# Altium PCB mainboard_v1(1).PcbDoc
Units mm, origin at the board's own origin, x right, y up, seen from the top; angles counter-clockwise.
Board outline 28 x 41 mm, 4 copper layers (F.Cu, GND, PWR, B.Cu); 67 components, 54 nets, 272 pads, 135 vias.
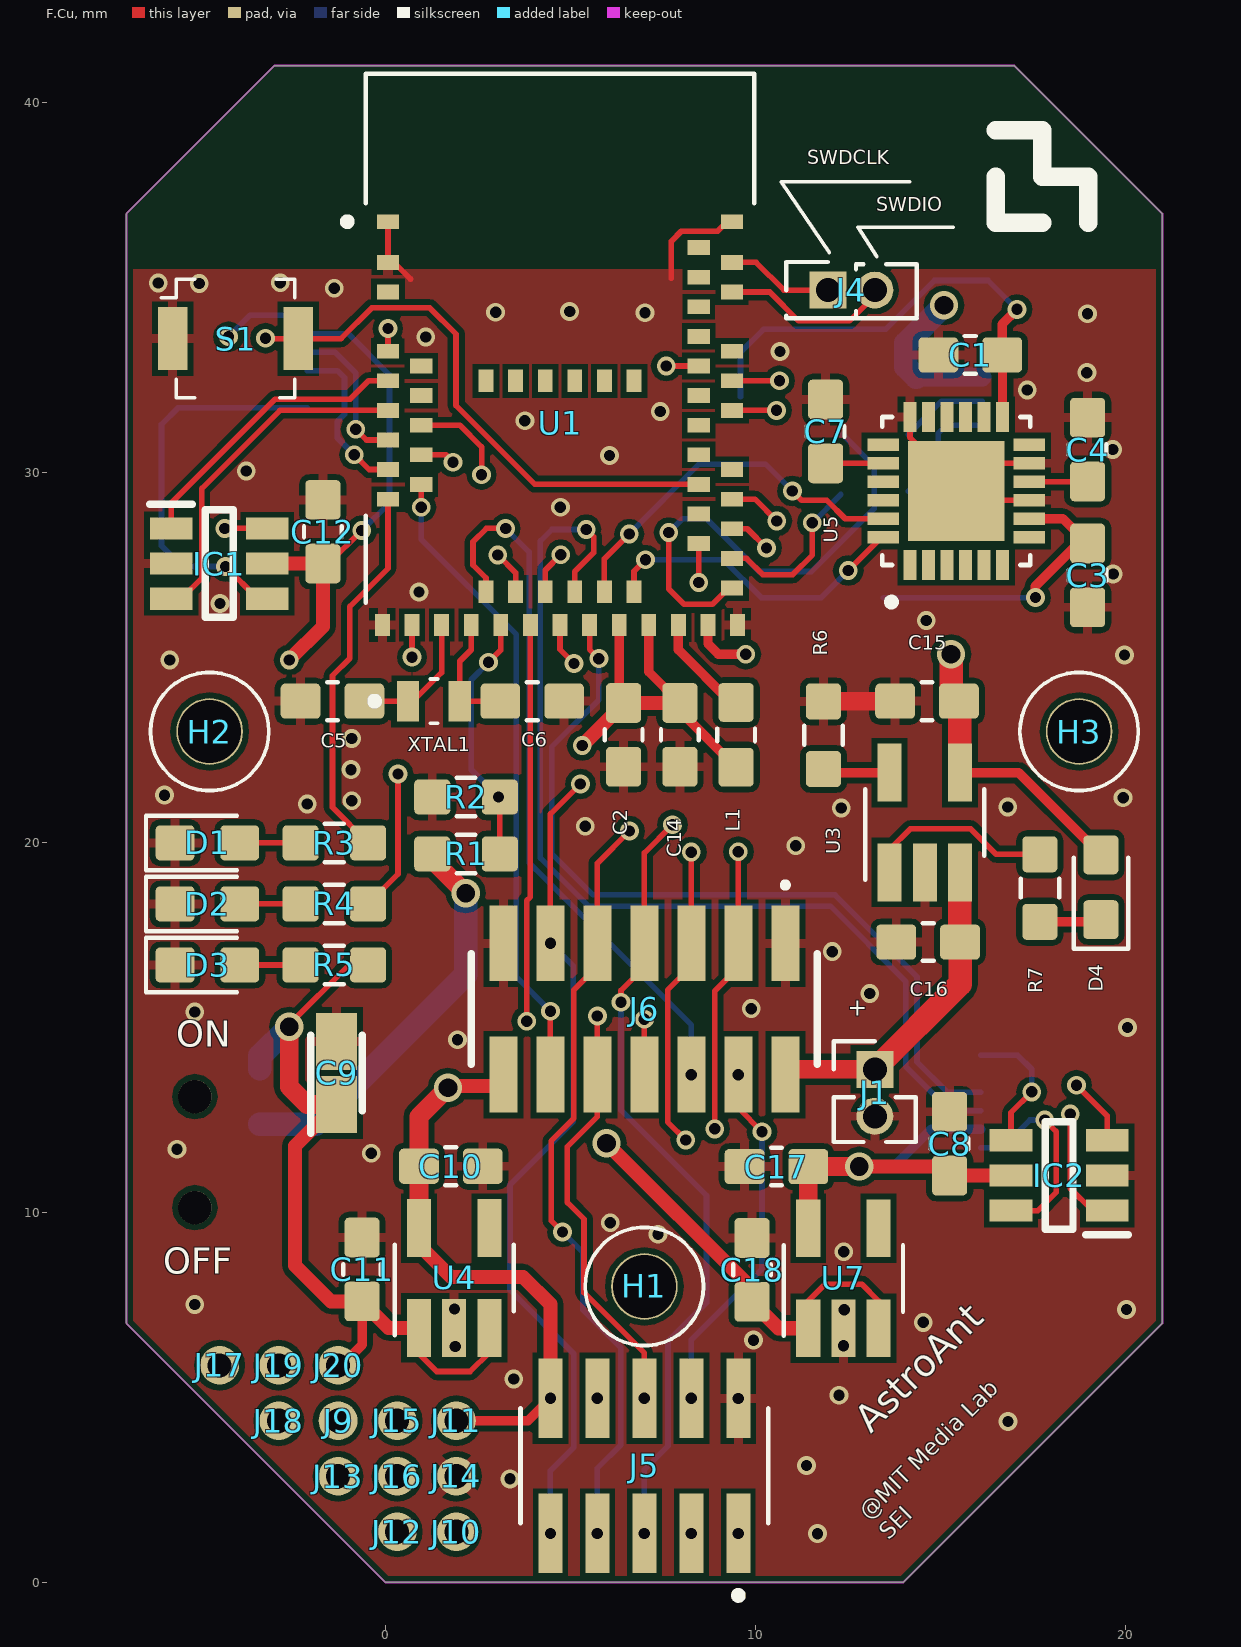
[diagram p0: F.Cu view]
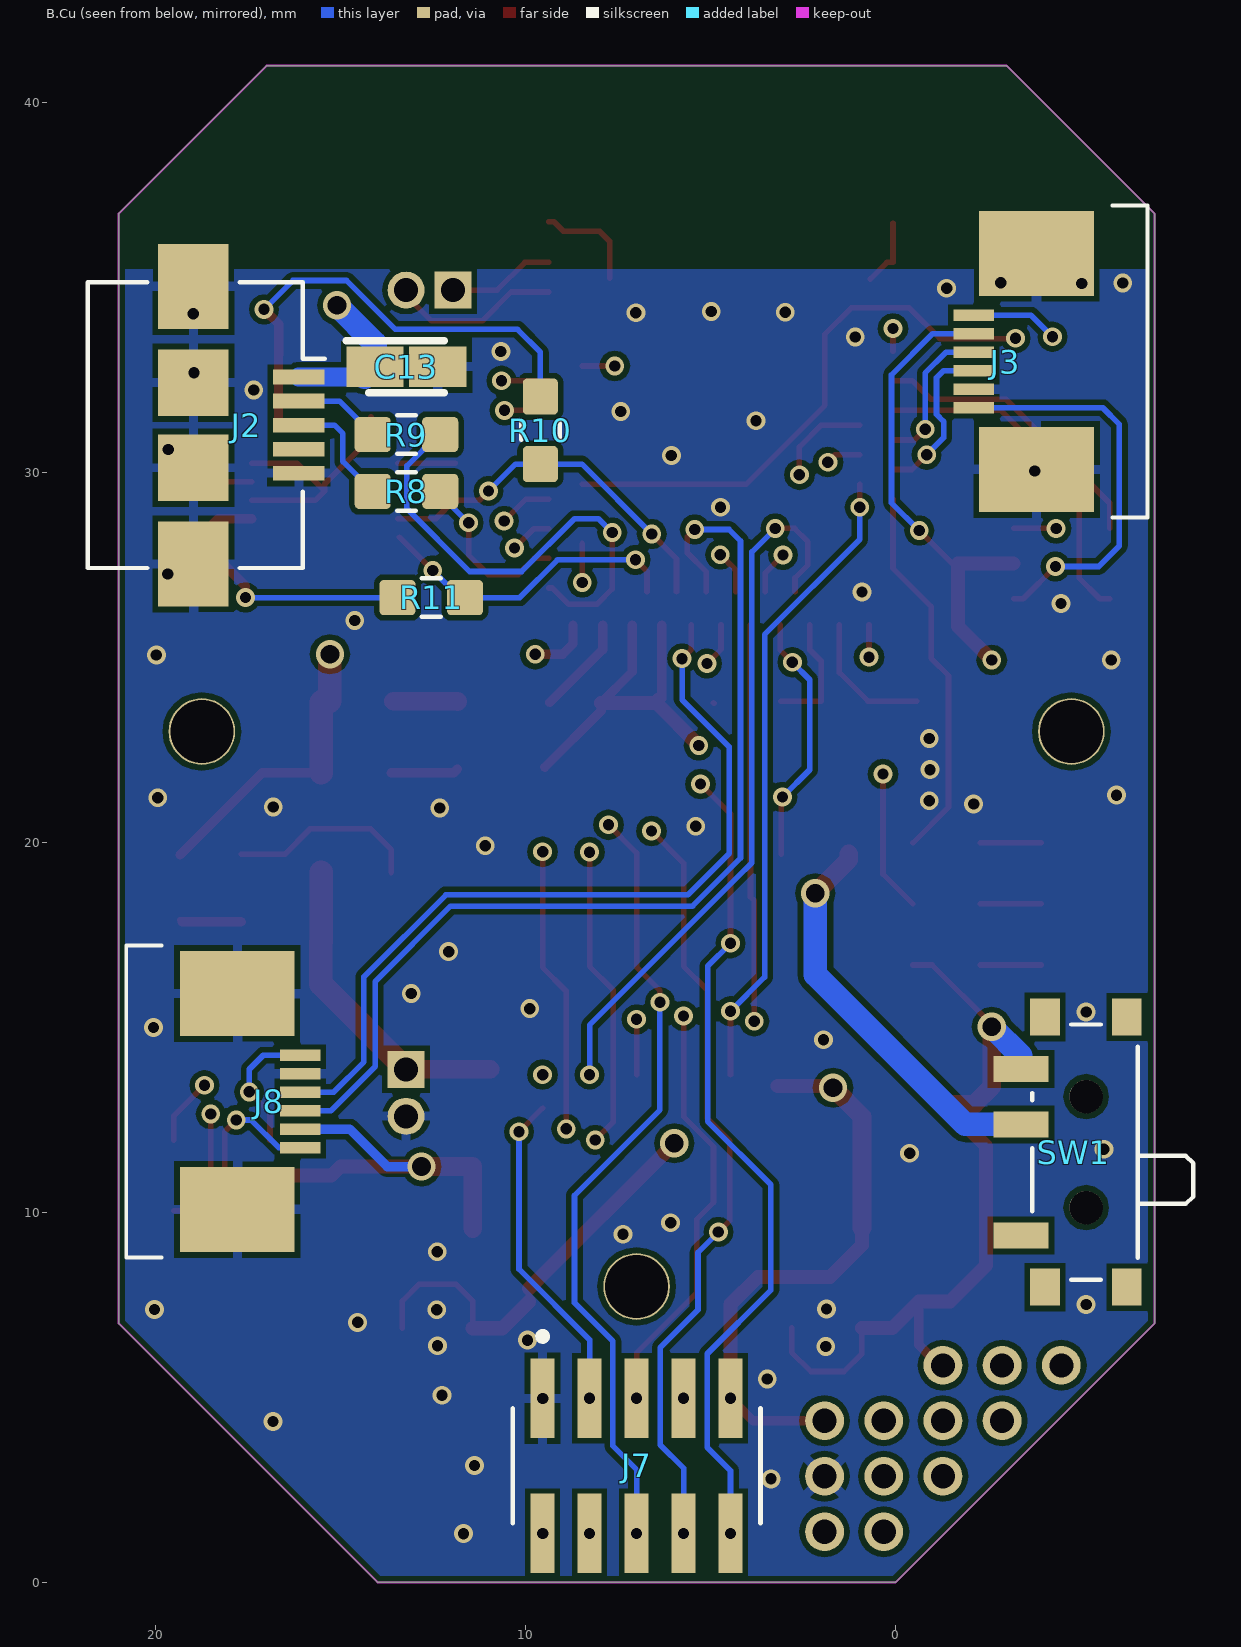
[diagram p1: B.Cu view, seen from below]
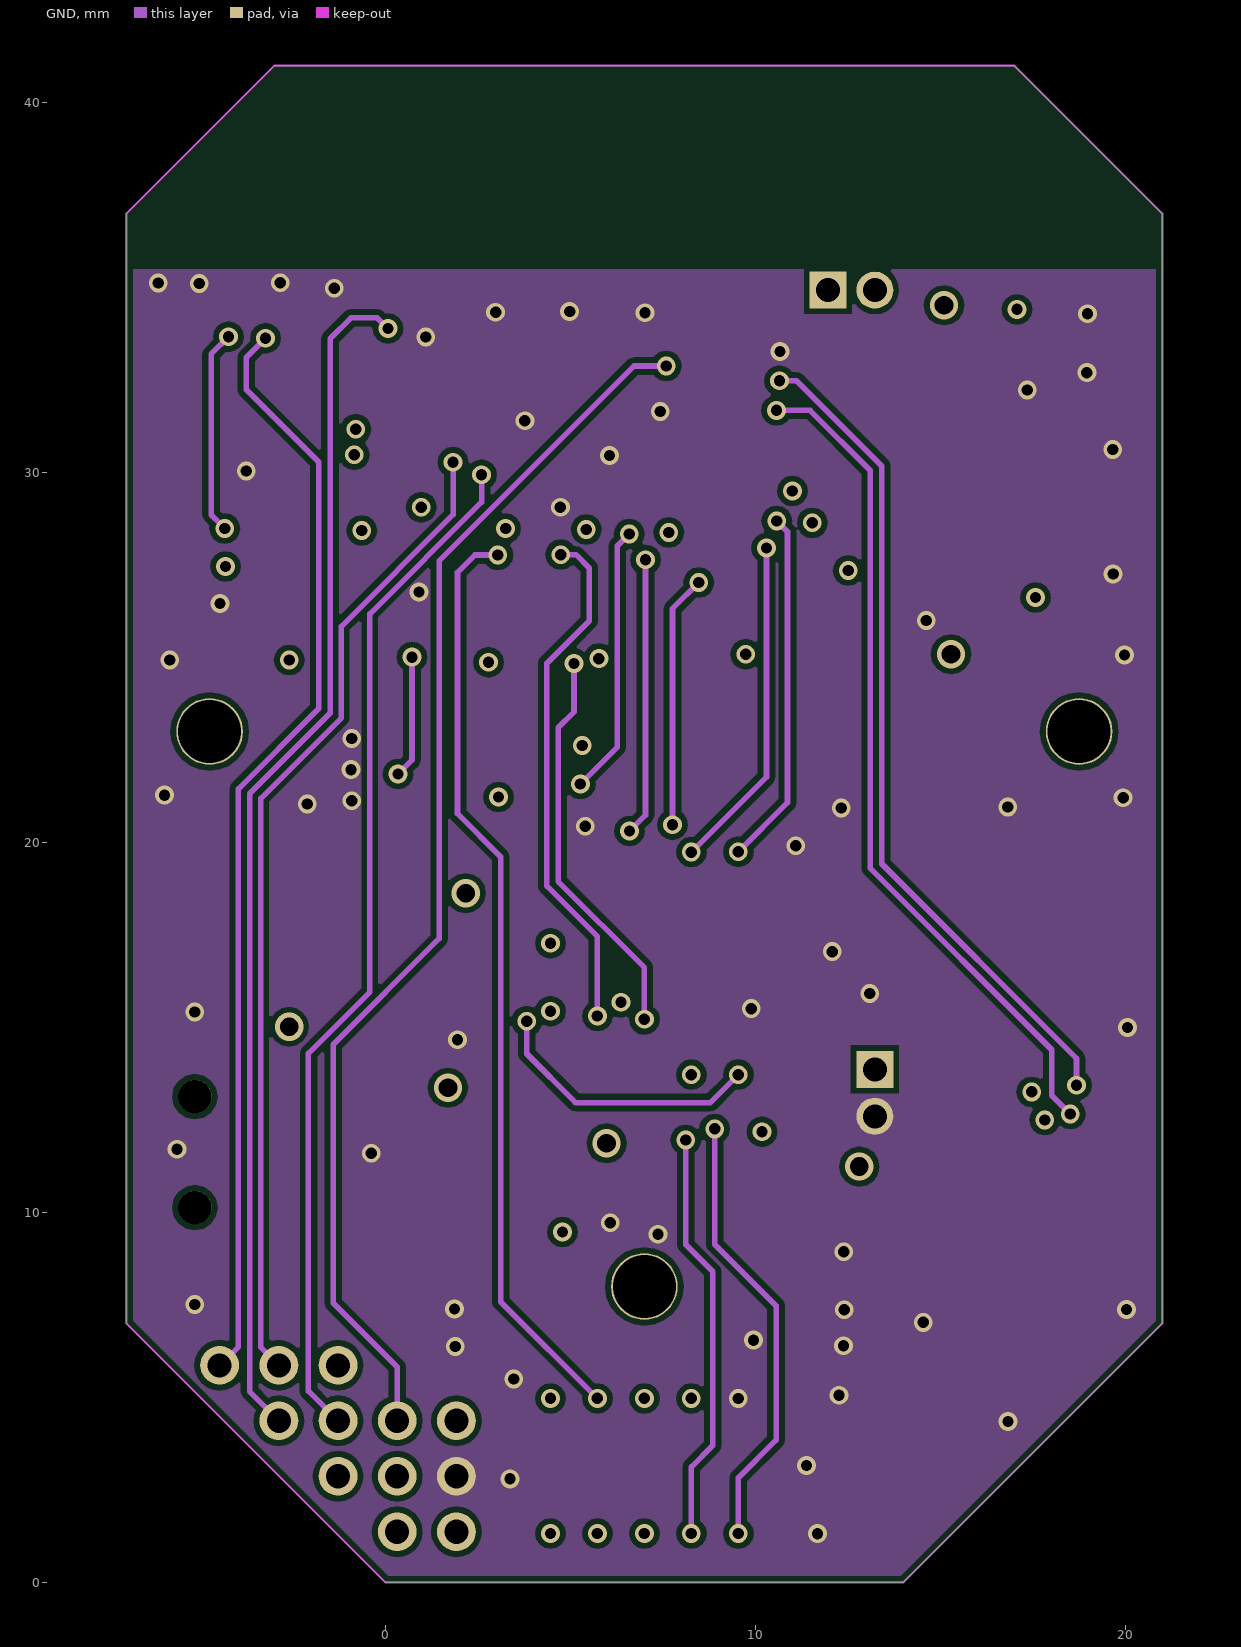
[diagram p2: GND]
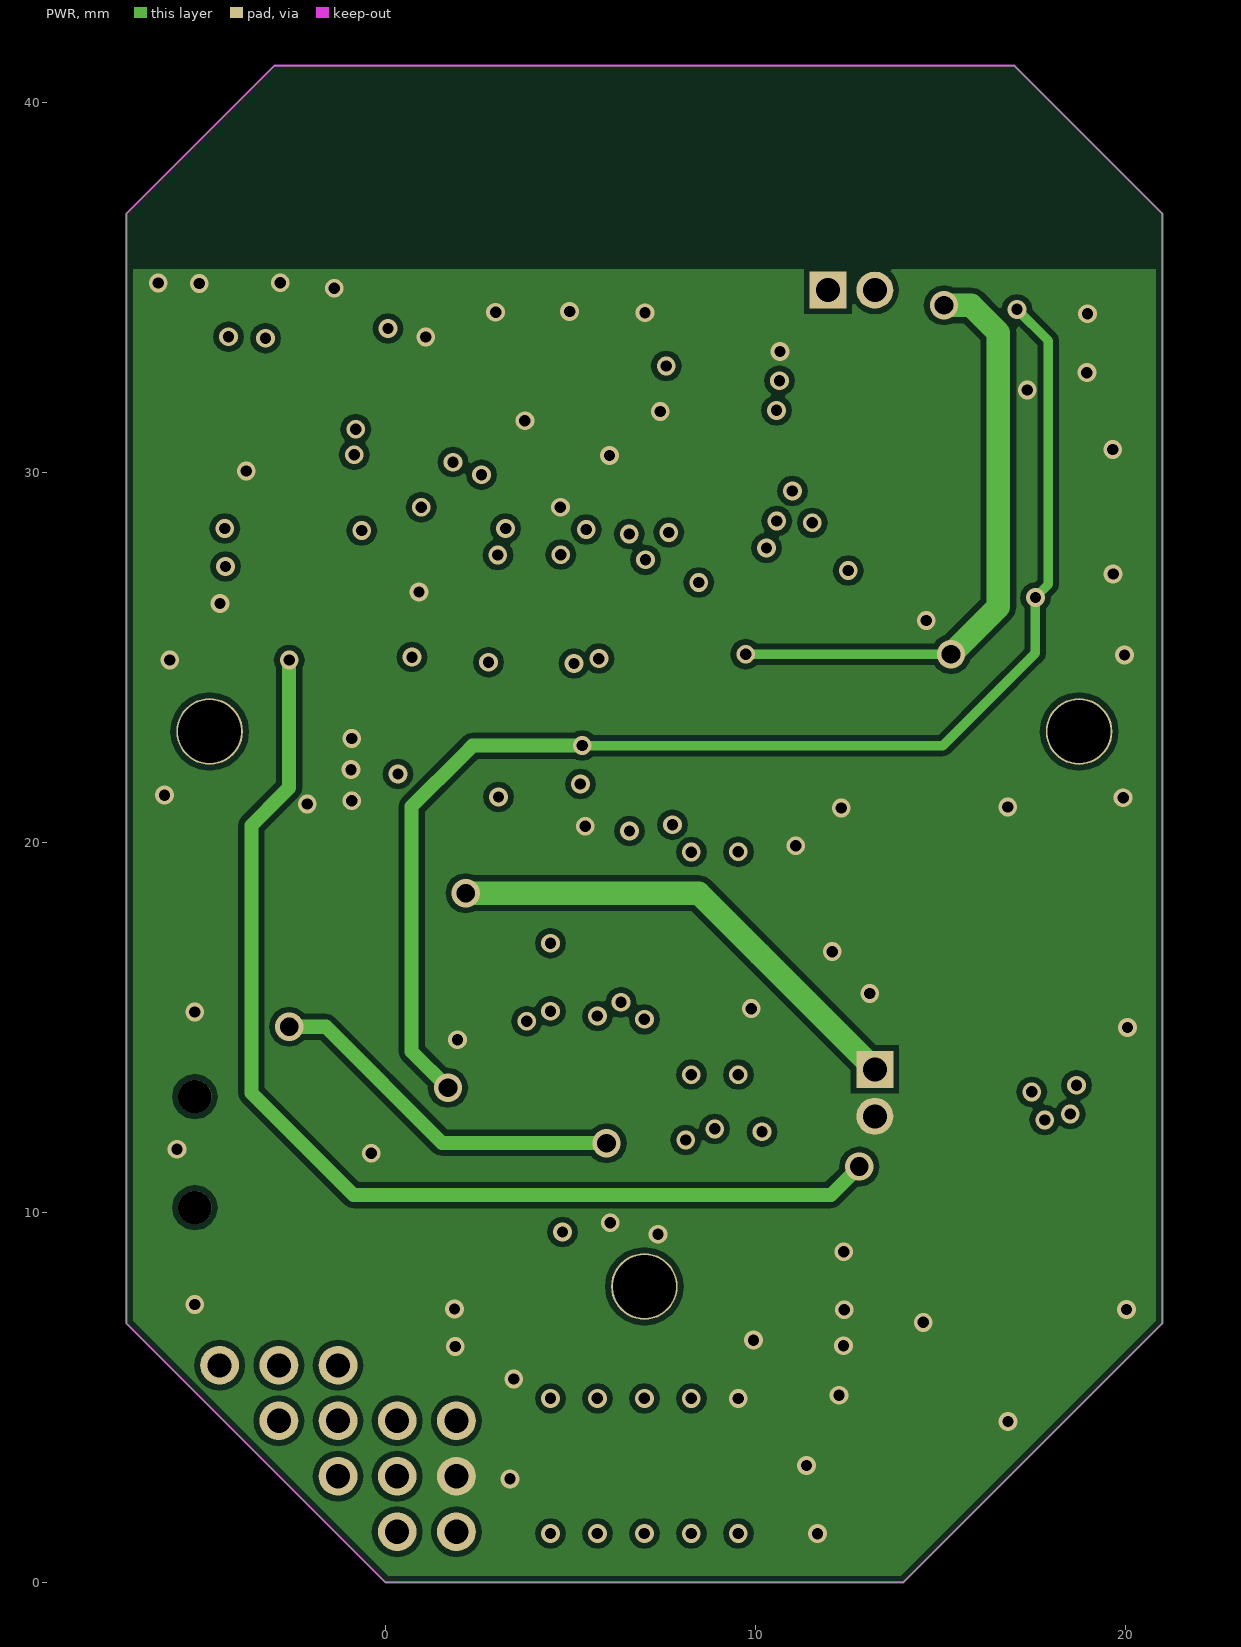
[diagram p3: PWR]

## Layer stack, top to bottom
F.Mask: solder mask 0.0102, Solder Resist, Dk 3.5
F.Cu: signal copper 0.0356
Dielectric 1: dielectric 0.32, FR-4, Dk 4.8
GND: signal copper 0.0356
Dielectric2: dielectric 0.32, FR-4, Dk 4.8
PWR: signal copper 0.0356
Dielectric3: dielectric 0.32, FR-4, Dk 4.8
B.Cu: signal copper 0.0356
B.Mask: solder mask 0.0102, Solder Resist, Dk 3.5

## Board outline
17,41 21,37 21,7 14,0 0,0 -7,7 -7,37 -3,41 17,41

## Design rules (kind name [scope] priority, off if disabled: settings)
Clearance "Clearence 0.1524_NetClass" [InNetClass('Default')] p1: gap=0.152 ignorepadtopadclearanceinfootprint=FALSE
Clearance "Clearence 0.1524_Polygon" [InNamedPolygon('F.Cu-GND') OR InNamedPolygon('GND-GND') OR InNamedPolygon('B.Cu-GND') OR InNamedPolygon('PWR-GND')] p2: gap=0.152 ignorepadtopadclearanceinfootprint=FALSE
HoleSize "Hole Size (Default)" [All] p1: absolutevalues=TRUE maxlimit=10 minlimit=0.305 maxpercent=80.000 minpercent=20.000
MinimumSolderMaskSliver [All] p1: minsoldermaskwidth=0
PolygonConnect Polygon_PWR-GND_ConnectDirect [IsNamedPolygon('PWR-GND')] p1: connectstyle=Direct reliefconductorwidth=0.254 reliefentries=4 polygonreliefangle="90 Angle" airgapwidth=0.254
PolygonConnect Polygon_B.Cu-GND_ConnectDirect [IsNamedPolygon('B.Cu-GND') vs IsVia] p2: connectstyle=Direct reliefconductorwidth=0.254 reliefentries=4 polygonreliefangle="90 Angle" airgapwidth=0.254
PolygonConnect Polygon_B.Cu-GND_ConnectRelief45 [IsNamedPolygon('B.Cu-GND') vs (IsThruPin or IsSMTPin) and (PadShape_AllLayers = 'Round')] p3: connectstyle=Relief reliefconductorwidth=0.254 reliefentries=4 polygonreliefangle="45 Angle" airgapwidth=0.152
PolygonConnect Polygon_B.Cu-GND_ConnectRelief90 [IsNamedPolygon('B.Cu-GND') vs (IsThruPin or IsSMTPin) and (PadShape_AllLayers <> 'Round')] p4: connectstyle=Relief reliefconductorwidth=0.254 reliefentries=4 polygonreliefangle="90 Angle" airgapwidth=0.152
PolygonConnect Polygon_GND-GND_ConnectDirect [IsNamedPolygon('GND-GND')] p5: connectstyle=Direct reliefconductorwidth=0.254 reliefentries=4 polygonreliefangle="90 Angle" airgapwidth=0.254
PolygonConnect Polygon_F.Cu-GND_ConnectDirect [IsNamedPolygon('F.Cu-GND') vs IsVia] p6: connectstyle=Direct reliefconductorwidth=0.254 reliefentries=4 polygonreliefangle="90 Angle" airgapwidth=0.254
PolygonConnect Polygon_F.Cu-GND_ConnectRelief45 [IsNamedPolygon('F.Cu-GND') vs (IsThruPin or IsSMTPin) and (PadShape_AllLayers = 'Round')] p7: connectstyle=Relief reliefconductorwidth=0.254 reliefentries=4 polygonreliefangle="45 Angle" airgapwidth=0.152
PolygonConnect Polygon_F.Cu-GND_ConnectRelief90 [IsNamedPolygon('F.Cu-GND') vs (IsThruPin or IsSMTPin) and (PadShape_AllLayers <> 'Round')] p8: connectstyle=Relief reliefconductorwidth=0.254 reliefentries=4 polygonreliefangle="90 Angle" airgapwidth=0.152
RoutingVias [All] p1: holewidth=0.711 width=1.27 viastyle="Through Hole" minholewidth=0.711 minwidth=1.27 maxholewidth=0.711 maxwidth=1.27
SilkToSilkClearance [All] p1: silktosilkclearance=0
SilkToSolderMaskClearance [IsPad] p1: minsilkscreentomaskgap=0 clearancetoexposedcopper=TRUE
SolderMaskExpansion [All] p1: expansion=0.102 istentingtop=FALSE
Width [All] p1: maxlimit=10 minlimit=0.152 preferedwidth=0.152 minimp=50.000000 maximp=50.000000 favimp=50.000000
26 further rules are at their usual default settings.

## Classes and differential pairs
net class Default: +3V3 A0 A1 A3 A5 D5 D6 D9 D11 D12 D13 GND GP0 GP2 LED1 LED2 M1_IN1 M1_IN2 M1_O1 M1_O2 M2_IN1 M2_IN2 M2_O1 M2_O2 MISO MOSI MOTOR1_A MOTOR1_B Net-(C4-Pad2) Net-(C5-Pad1) Net-(C6-Pad1) Net-(C7-Pad2) Net-(C11-Pad2) Net-(D1-Pad2) Net-(D2-Pad2) Net-(D3-Pad2) Net-(D4-Pad1) Net-(L1-Pad2) Net-(R6-Pad1) Net-(R7-Pad2) Net-(R8-Pad2) Net-(R9-Pad2) R\E\S\E\T\ SCK SCL SDA SWDCLK SWDIO SWO USB+ USB- VBUS VCC VPP

## Components (designator, comment, footprint, x,y, rotation, side; value= is the part's Value field where it differs from the comment)
C1 "0.1uF" C_0603_1608Metric_Pad1.08x0.95mm_HandSolder 15.81,33.18 r0 top
C2 "10uF" C_0603_1608Metric_Pad1.08x0.95mm_HandSolder 6.44,22.91 r90 top
C3 "10000pF" C_0603_1608Metric_Pad1.08x0.95mm_HandSolder 18.98,27.22 r90 top
C4 "0.1uF" C_0603_1608Metric_Pad1.08x0.95mm_HandSolder 18.98,30.62 r270 top
C5 "22PF" C_0603_1608Metric_Pad1.08x0.95mm_HandSolder -1.43,23.82 r180 top
C6 "22PF" C_0603_1608Metric_Pad1.08x0.95mm_HandSolder 3.97,23.82 r0 top
C7 "2200pF" C_0603_1608Metric_Pad1.08x0.95mm_HandSolder 11.9,31.11 r270 top
C8 "0.1uF" C_0603_1608Metric_Pad1.08x0.95mm_HandSolder 15.25,11.86 r270 top
C9 "TAJP106K010RNJ" CAPPM2014X170N#1 -1.32,13.77 r90 top
C10 "10uF" C_0603_1608Metric_Pad1.08x0.95mm_HandSolder 1.77,11.25 r180 top
C11 "0.1uF" C_0603_1608Metric_Pad1.08x0.95mm_HandSolder -0.63,8.46 r270 top
C12 "0.1uF" C_0603_1608Metric_Pad1.08x0.95mm_HandSolder -1.69,28.4 r270 top
C13 "TAJP106K010RNJ" CAPPM2014X170N#2 13.22,32.86 r0 bottom
C14 "10uF" C_0603_1608Metric_Pad1.08x0.95mm_HandSolder 7.96,22.91 r90 top
C15 "10uF" C_0603_1608Metric_Pad1.08x0.95mm_HandSolder 14.64,23.82 r0 top
C16 "10uF" C_0603_1608Metric_Pad1.08x0.95mm_HandSolder 14.67,17.31 r0 top
C17 "10uF" C_0603_1608Metric_Pad1.08x0.95mm_HandSolder 10.57,11.24 r0 top
C18 "0.1uF" C_0603_1608Metric_Pad1.08x0.95mm_HandSolder 9.91,8.45 r270 top
D1 "LED" LED_0603_1608Metric_Pad1.05x0.95mm_HandSolder -4.81,19.99 r0 top
D2 "LED" LED_0603_1608Metric_Pad1.05x0.95mm_HandSolder -4.81,18.34 r0 top
D3 "LED" LED_0603_1608Metric_Pad1.05x0.95mm_HandSolder -4.81,16.69 r0 top
D4 "LED" LED_0603_1608Metric_Pad1.05x0.95mm_HandSolder 19.34,18.79 r90 top
H1 "M2" mounthole_1.8mm 7,8 r0 top
H2 "M2" mounthole_1.8mm -4.75,23 r0 top
H3 "M2" mounthole_1.8mm 18.75,23 r0 top
IC1 "MP6513GJ-Z" SOT95P280X100-6N -4.49,27.54 r0 top
IC2 "MP6513GJ-Z" SOT95P280X100-6N 18.21,11 r180 top
J1 "22-23-2021" PinHeader_1x02_P1.27mm_Vertical 13.23,13.87 r0 top
J2 "USB_B_Micro" USB_Micro-B_Amphenol_10104110_Horizontal 17.68,31.28 r90 bottom
J3 "1734592-6" 17345926 -4.61,33 r270 bottom
J4 "22-23-2021" PinHeader_2x01_P1.27mm_Vertical 11.96,34.93 r0 top
J5 "20021321-00010C4LF" HARWIN_M50-3100545#1 7,3.15 r0 top
J6 "20021321-00014C1LF" 2002132100014C1LF 7,15.5 r0 top
J7 "20021321-00010C4LF" HARWIN_M50-3100545#2 7,3.15 r180 bottom
J8 "1734592-6" 17345926 18.59,13 r90 bottom
J9 "1_pin_sig" 1.27mm_pin_hole#1 -2.04,4.37 r0 top
J10 "1_pin_sig" 1.27mm_pin_hole#2 1.92,1.37 r0 top
J11 "1_pin_sig" 1.27mm_pin_hole#3 2.56,4.37 r0 top
J12 "1_pin_sig" 1.27mm_pin_hole#2 0.32,1.37 r0 top
J13 "1_pin_sig" 1.27mm_pin_hole#4 3.36,2.87 r0 top
J14 "1_pin_sig" 1.27mm_pin_hole#5 6.61,2.87 r0 top
J15 "1_pin_sig" 1.27mm_pin_hole#2 0.32,4.37 r0 top
J16 "1_pin_sig" 1.27mm_pin_hole#6 5,2.87 r0 top
J17 "1_pin_sig" 1.27mm_pin_hole#2 -4.48,5.87 r0 top
J18 "1_pin_sig" 1.27mm_pin_hole#2 -2.88,4.37 r0 top
J19 "1_pin_sig" 1.27mm_pin_hole#2 -2.88,5.87 r0 top
J20 "1_pin_sig" 1.27mm_pin_hole#2 -1.28,5.87 r0 top
L1 "10uH" L_0603_1608Metric_Pad1.05x0.95mm_HandSolder 9.48,22.91 r90 top
R1 "100k" R_0603_1608Metric_Pad0.98x0.95mm_HandSolder#1 2.18,19.69 r180 top
R2 "100k" R_0603_1608Metric_Pad0.98x0.95mm_HandSolder#1 2.18,21.23 r0 top
R3 "1k" R_0603_1608Metric_Pad0.98x0.95mm_HandSolder#1 -1.38,19.99 r0 top
R4 "1k" R_0603_1608Metric_Pad0.98x0.95mm_HandSolder#1 -1.38,18.34 r0 top
R5 "1k" R_0603_1608Metric_Pad0.98x0.95mm_HandSolder#1 -1.38,16.69 r180 top
R6 "4.99k" R_0603_1608Metric_Pad0.98x0.95mm_HandSolder#1 11.84,22.9 r90 top
R7 "1k" R_0603_1608Metric_Pad0.98x0.95mm_HandSolder#1 17.69,18.767 r90 top
R8 "27" R_0603_1608Metric_Pad0.98x0.95mm_HandSolder#2 13.22,29.49 r0 bottom
R9 "27" R_0603_1608Metric_Pad0.98x0.95mm_HandSolder#2 13.22,31.027 r0 bottom
R10 "10k" R_0603_1608Metric_Pad0.98x0.95mm_HandSolder#2 9.6,31.14 r270 bottom
R11 "10k" R_0603_1608Metric_Pad0.98x0.95mm_HandSolder#2 12.55,26.62 r180 bottom
S1 "B3U-1000P" Switch_Tactile_SMD_B3U-1000P -4.05,33.62 r0 top
SW1 "SW_SPDT" SW_SPDT_PCM12 -4.82,11.63 r270 bottom
U1 "MDBT50Q-1MV2" XCVR_MDBT50Q-1MV2 4.72,33.03 r0 top
U3 "MCP73831T-2ACI_OT" SOT-23-5_HandSoldering 14.58,20.54 r90 top
U4 "AP2112K-3.3" SOT-23-5_HandSoldering 1.86,8.23 r90 top
U5 "MPU6050" IC_MPU6050 15.43,29.5 r90 top
U7 "AP2112K-3.3" SOT-23-5_HandSoldering 12.38,8.22 r90 top
XTAL1 "32.768KHz" ECS32712512TR 1.31,23.82 r0 top

## Footprints (in the part's own frame and the unit in brackets; to place one, negate y for a bottom-side part, rotate by r counter-clockwise, add the part's x,y. Pads: shape width x height; smd on the part's side, far side on the other; paste and mask are expansions set on the pad)
1.27mm_pin_hole#1 [mm]
  round 1.05 hole 0.65 paste-1.05 mask+0: 1(0.76,0)
1.27mm_pin_hole#2 [mm]
  round 1.05 hole 0.65 paste-1.05 mask+0: 1(0,0)
1.27mm_pin_hole#3 [mm]
  round 1.05 hole 0.65 paste-1.05 mask+0: 1(-0.64,0)
1.27mm_pin_hole#4 [mm]
  round 1.05 hole 0.65 paste-1.05 mask+0: 1(-4.64,0)
1.27mm_pin_hole#5 [mm]
  round 1.05 hole 0.65 paste-1.05 mask+0: 1(-4.69,0)
1.27mm_pin_hole#6 [mm]
  round 1.05 hole 0.65 paste-1.05 mask+0: 1(-4.68,0)
17345926 [mm]
  rect 0.3x1.1 smd mask+0: 1(1.25,-2.5) 2(0.75,-2.5) 3(0.25,-2.5) 4(-0.25,-2.5) 5(-0.75,-2.5) 6(-1.25,-2.5)
  rect 2.3x3.1 smd mask+0: MP1(2.92,-0.8) MP2(-2.92,-0.8)
  silkscreen extent -4.22,1.25 4.22,2.2
2002132100014C1LF [mm]
  rect 0.76x2.05 smd mask+0: 1(3.81,1.775) 2(3.81,-1.775) 3(2.54,1.775) 4(2.54,-1.775) 5(1.27,1.775) 6(1.27,-1.775) 7(0,1.775) 8(0,-1.775) 9(-1.27,1.775) 10(-1.27,-1.775) 11(-2.54,1.775) 12(-2.54,-1.775) 13(-3.81,1.775) 14(-3.81,-1.775)
  silkscreen extent -4.67,-1.5 4.67,3.4
C_0603_1608Metric_Pad1.08x0.95mm_HandSolder [mm]
  rrect25% 1.075x0.95 smd mask+0: 1(-0.863,0) 2(0.863,0)
  silkscreen extent -0.15,-0.51 0.15,0.51
CAPPM2014X170N#1 [mm]
  rect 1.55x1.1 smd mask+0: 1(-0.85,0) 2(0.85,0)
  silkscreen extent -1.63,-0.7 1.02,0.7
CAPPM2014X170N#2 [mm]
  rect 1.55x1.1 smd mask+0: 1(0.85,0) 2(-0.85,0)
  silkscreen extent -1.02,-0.7 1.63,0.7
ECS32712512TR [mm]
  rect 0.6x1.1 smd mask+0: 1(-0.7,0) 2(0.7,0)
  silkscreen extent -1.7,-0.6 0.1,0.6
HARWIN_M50-3100545#1 [mm]
  rect 0.65x2.15 smd mask+0: 1(2.54,-1.825) 2(2.54,1.825) 3(1.27,-1.825) 4(1.27,1.825) 5(0,-1.825) 6(0,1.825) 7(-1.27,-1.825) 8(-1.27,1.825) 9(-2.54,-1.825) 10(-2.54,1.825)
  silkscreen extent -3.35,-3.6 3.35,1.55
HARWIN_M50-3100545#2 [mm]
  rect 0.65x2.15 smd mask+0: 1(-2.54,1.825) 2(-2.54,-1.825) 3(-1.27,1.825) 4(-1.27,-1.825) 5(0,1.825) 6(0,-1.825) 7(1.27,1.825) 8(1.27,-1.825) 9(2.54,1.825) 10(2.54,-1.825)
  silkscreen extent -3.35,-1.55 3.35,3.6
IC_MPU6050 [mm]
  rect 0.8x0.35 smd mask+0: 1(-2,1.25) 2(-2,0.75) 3(-2,0.25) 4(-2,-0.25) 5(-2,-0.75) 6(-2,-1.25) 13(2,-1.25) 14(2,-0.75) 15(2,-0.25) 16(2,0.25) 17(2,0.75) 18(2,1.25)
  rect 0.35x0.85 smd mask+0: 7(-1.25,-1.975) 8(-0.75,-1.975) 9(-0.25,-1.975) 10(0.25,-1.975) 11(0.75,-1.975) 12(1.25,-1.975) 19(1.25,1.975) 20(0.75,1.975) 21(0.25,1.975) 22(-0.25,1.975) 23(-0.75,1.975) 24(-1.25,1.975)
  rect 2.7x2.6 smd paste-2.7 mask+0: 25(0,0)
  silkscreen extent -3.1,-2 2,2
L_0603_1608Metric_Pad1.05x0.95mm_HandSolder [mm]
  rrect25% 1.05x0.95 smd mask+0: 1(-0.875,0) 2(0.875,0)
  silkscreen extent -0.17,-0.51 0.17,0.51
LED_0603_1608Metric_Pad1.05x0.95mm_HandSolder [mm]
  rrect25% 1.05x0.95 smd mask+0: 1(-0.875,0) 2(0.875,0)
  silkscreen extent -1.66,-0.73 0.8,0.73
mounthole_1.8mm [mm]
  round 1.8 hole 1.7 paste-1.8 mask+0: Un1(0,0)
  silkscreen extent -1.6,-1.6 1.6,1.6
PinHeader_1x02_P1.27mm_Vertical [mm]
  rect 1x1 hole 0.65 paste-1 mask+0: 1(0,0)
  rrect100% 1x1 hole 0.65 paste-1 mask+0: 2(0,-1.27)
  silkscreen extent -1.11,-1.96 1.11,0.76
PinHeader_2x01_P1.27mm_Vertical [mm]
  rect 1x1 hole 0.65 paste-1 mask+0: 1(0,0)
  rrect100% 1x1 hole 0.65 paste-1 mask+0: 2(1.27,0)
  silkscreen extent -1.13,-0.76 2.4,0.76
R_0603_1608Metric_Pad0.98x0.95mm_HandSolder#1 [mm]
  rrect25% 0.975x0.95 smd mask+0: 1(-0.913,0) 2(0.913,0)
  silkscreen extent -0.25,-0.52 0.25,0.52
R_0603_1608Metric_Pad0.98x0.95mm_HandSolder#2 [mm]
  rrect25% 0.975x0.95 smd mask+0: 1(0.913,0) 2(-0.913,0)
  silkscreen extent -0.25,-0.52 0.25,0.52
SOT95P280X100-6N [mm]
  rect 1.15x0.6 smd mask+0: 1(-1.3,0.95) 2(-1.3,0) 3(-1.3,-0.95) 4(1.3,-0.95) 5(1.3,0) 6(1.3,0.95)
  silkscreen extent -1.88,-1.45 0.38,1.6
SOT-23-5_HandSoldering [mm]
  rect 1.56x0.65 smd mask+0: 1(-1.35,0.95) 2(-1.35,0) 3(-1.35,-0.95) 4(1.35,-0.95) 5(1.35,0.95)
  silkscreen extent -1.55,-1.61 0.9,1.61
SW_SPDT_PCM12 [mm]
  rect 0.7x1.5 smd mask+0: 1(2.25,-1.43) 2(-0.75,-1.43) 3(-2.25,-1.43)
  round 0.9 hole 0.9 paste-0.9 mask+0: Un1(1.5,0.33) Un2(-1.5,0.33)
  rect 1x0.8 smd mask+0: Un3(3.65,1.43) Un4(-3.65,1.43) Un5(-3.65,-0.78) Un6(3.65,-0.78)
  silkscreen extent -3.45,-1.12 3.45,3.23
Switch_Tactile_SMD_B3U-1000P [mm]
  rect 0.8x1.7 smd mask+0: 1(-1.7,0) 2(1.7,0)
  silkscreen extent -2,-1.6 1.6,1.6
USB_Micro-B_Amphenol_10104110_Horizontal [mm]
  rect 0.4x1.4 smd mask+0: 1(1.3,-1.55) 2(0.65,-1.55) 3(0,-1.55) 4(-0.65,-1.55) 5(-1.3,-1.55)
  rect 2.3x1.9 smd mask+0: 6(-3.75,1.3) 6(3.75,1.3)
  rect 1.8x1.9 smd mask+0: 6(-1.15,1.3) 6(1.15,1.3)
  silkscreen extent -3.86,-2.25 3.86,4.16
XCVR_MDBT50Q-1MV2 [mm]
  rect 0.6x0.4 smd mask+0: 1(-4.65,3.75) 2(-4.65,2.65) 3(-4.65,1.85) 4(-4.65,0.25) 5(-3.75,-0.15) 6(-4.65,-0.55) 7(-3.75,-0.95) 8(-4.65,-1.35) 9(-3.75,-1.75) 10(-4.65,-2.15) 11(-3.75,-2.55) 12(-4.65,-2.95) 13(-3.75,-3.35) 14(-4.65,-3.75) 34(4.65,-6.15) 35(4.65,-5.35) 36(3.75,-4.95) 37(4.65,-4.55) 38(3.75,-4.15) 39(4.65,-3.75) 40(3.75,-3.35) 41(4.65,-2.95) 42(3.75,-2.55) 43(3.75,-1.75) 44(4.65,-1.35) 45(3.75,-0.95) 46(4.65,-0.55) 47(3.75,-0.15) 48(4.65,0.25) 49(3.75,0.65) 50(3.75,1.45) 51(4.65,1.85) 52(3.75,2.25) 53(4.65,2.65) 54(3.75,3.05) 55(4.65,3.75)
  rect 0.4x0.6 smd mask+0: 15(-4.8,-7.15) 16(-4,-7.15) 17(-3.2,-7.15) 18(-2.4,-7.15) 19(-2,-6.25) 20(-1.6,-7.15) 21(-1.2,-6.25) 22(-0.8,-7.15) 23(-0.4,-6.25) 24(0,-7.15) 25(0.4,-6.25) 26(0.8,-7.15) 27(1.2,-6.25) 28(1.6,-7.15) 29(2,-6.25) 30(2.4,-7.15) 31(3.2,-7.15) 32(4,-7.15) 33(4.8,-7.15) 56(-2,-0.55) 57(-1.2,-0.55) 58(-0.4,-0.55) 59(0.4,-0.55) 60(1.2,-0.55) 61(2,-0.55)
  silkscreen extent -5.85,-6.55 5.25,7.75

## Part data
C1 C2 C3 C4 C5 C6 C7 C8 C10 C11 C12 C14 C15 C16 C17 C18: library part C_0603_1608Metric_Pad1.08x0.95mm_HandSolder, "Capacitor SMD 0603 (1608 Metric), square (rectangular) end terminal, IPC_7351 nominal with elongated pad for handsoldering. (Body size source: IPC-SM-782 page 76, https://www.pcb-3d.com/wordpress/wp-content/uploads/ipc-sm-782a_amendment_1_and_2.pdf), generated with kicad-footprint-generator"
C9 C13: library part CAPPM2014X170N, "P CASE"
D1 D2 D3 D4: library part LED_0603_1608Metric_Pad1.05x0.95mm_HandSolder, "LED SMD 0603 (1608 Metric), square (rectangular) end terminal, IPC_7351 nominal, (Body size source: http://www.tortai-tech.com/upload/download/2011102023233369053.pdf), generated with kicad-footprint-generator"
H1 H2 H3: library part mounthole_1.8mm
IC1 IC2: library part SOT95P280X100-6N, "TSOT-23-6"
J1: library part PinHeader_1x02_P1.27mm_Vertical, "Through hole straight pin header, 1x02, 1.27mm pitch, single row"
J2: library part USB_Micro-B_Amphenol_10104110_Horizontal, "USB Micro-B, horizontal, https://cdn.amphenol-icc.com/media/wysiwyg/files/drawing/10104110.pdf"
J3 J8: library part 17345926, "1734592-6-2"
J4: library part PinHeader_2x01_P1.27mm_Vertical, "Through hole straight pin header, 2x01, 1.27mm pitch, double rows"
J5 J7: library part HARWIN_M50-3100545
J6: library part 2002132100014C1LF, "20021321-00014C1LF-1"
J9 J10 J11 J12 J13 J14 J15 J16 J17 J18 J19 J20: library part 1.27mm_pin_hole
L1: library part L_0603_1608Metric_Pad1.05x0.95mm_HandSolder, "Inductor SMD 0603 (1608 Metric), square (rectangular) end terminal, IPC_7351 nominal with elongated pad for handsoldering. (Body size source: http://www.tortai-tech.com/upload/download/2011102023233369053.pdf), generated with kicad-footprint-generator"
R1 R2 R3 R4 R5 R6 R7 R8 R9 R10 R11: library part R_0603_1608Metric_Pad0.98x0.95mm_HandSolder, "Resistor SMD 0603 (1608 Metric), square (rectangular) end terminal, IPC_7351 nominal with elongated pad for handsoldering. (Body size source: IPC-SM-782 page 72, https://www.pcb-3d.com/wordpress/wp-content/uploads/ipc-sm-782a_amendment_1_and_2.pdf), generated with kicad-footprint-generator"
S1: library part Switch_Tactile_SMD_B3U-1000P
SW1: library part SW_SPDT_PCM12, "Ultraminiature Surface Mount Slide Switch, right-angle, https://www.ckswitches.com/media/1424/pcm.pdf"
U1: library part XCVR_MDBT50Q-1MV2
U3 U4 U7: library part SOT-23-5_HandSoldering, "5-pin SOT23 package"
U5: library part IC_MPU6050
XTAL1: library part ECS32712512TR, "ECS-.327-12.5-12-TR-1"

## Via types
v1: diameter 0.508, hole 0.305, F.Cu to B.Cu, tented both sides, 128 vias
v2: diameter 0.762, hole 0.508, F.Cu to B.Cu, tented both sides, 7 vias

## Nets (pads, with @x,y where several pads share a name; then routed paths per layer and width w, separated by ;. In a path a pad name is that pad's centre, name@x,y a point inside that pad or via, vN(x,y) a via of type N, cw(c..) or ccw(c..) an arc to the next point about the centre after c; other vN are vias at no path point)
+3V3: C1.2 C2.2 C3.2 C10.2 C14.2 J5.10 J6.14 J7.9 J11.1 L1.1 R10.2 R11.2 U1.28 U1.30 U4.5 U5.8 U5.13 | length 83
  F.Cu w0.152: C10.2 C10.2@0.91,11.247 ; C1.2 C1.2@16.68,33.172
  F.Cu w0.254: J11.1@1.82,4.37 3.855,4.37 v1(4.46,4.975) ; C2.2@6.32,23.892 U1.28 ; C2.2 C2.2@6.44,23.92 ; U1.30 7.12,24.612 C14.2 7.96,23.555 L1.1 ; C1.2 16.672,34.012 v1(17.07,34.41) ; U5.13 C1.2@16.68,33.172 ; U5.8 18.313,28.75 C3.2 C3.2@18.98,28.04 ; v1(17.57,26.62) 17.57,26.93 C3.2@18.723,28.082
  F.Cu w0.381: U4.5 0.91,9.12 1.77,8.26 3.72,8.26 4.46,7.52 v1(4.46,4.975) ; v2@1.655,13.415 J6.14@3.19,13.415 ; v1(5.32,22.62) 6.44,23.74 C2.2 C14.2
  F.Cu w0.508: C10.2 0.908,12.588 v2(1.69,13.37) ; U4.5 C10.2@0.91,11.247
  PWR w0.254: v1(5.32,22.62) 15.07,22.62 16.38,23.93 17.41,24.96 17.57,25.12 v1(17.57,26.62) ; v1(17.07,34.41) 17.92,33.56 17.92,26.98 v1@17.58,26.64
  PWR w0.381: v2(1.69,13.37) 0.71,14.35 0.71,16.96 0.71,18.7 0.71,20.97 2.12,22.38 2.36,22.62 v1(5.32,22.62)
  B.Cu w0.152: R10.2 9.6,33.25 10.22,33.87 13.52,33.87 14.84,35.19 16.29,35.19 v1(17.07,34.41) ; R11.2 v1@17.56,26.62
A0: R1.1 R2.2 U1.20 | length 6.8
  F.Cu w0.152: v1(2.79,24.87) 3.12,25.2 U1.20 ; R1.1 R2.2
  B.Cu w0.152: v1(2.79,24.87) 2.32,24.4 2.32,21.967 v1(3.057,21.23)
A1: J5.8 J7.7 U1.21 | length 26.4
  F.Cu w0.152: v1(3.04,27.77) 3.52,27.29 U1.21
  GND w0.152: v1(3.04,27.77) 2.42,27.77 1.95,27.3 1.95,20.78 3.12,19.61 3.12,7.585 v1(5.73,4.975)
A3: J6.12 U1.13 | length 17.4
  F.Cu w0.152: v1(0.97,29.06) U1.13 ; J6.12 v1(4.46,15.44)
  B.Cu w0.152: v1(0.97,29.06) 0.97,28.19 3.54,25.62 3.54,16.36 v1(4.46,15.44)
A5: J9.1 U1.9 | length 30.5
  F.Cu w0.152: U1.9 1.5,31.28 2.01,31.28 2.6,30.69 v1(2.6,29.94)
  GND w0.152: J9.1 -2.08,5.17 -2.08,14.301 -0.42,15.961 -0.42,26.18 2.6,29.2 v1(2.6,29.94)
D5: J8.4 U1.25 | length 28
  F.Cu w0.152: U1.25 5.12,27.32 5.63,27.83 5.63,28.26 v1(5.43,28.46)
  B.Cu w0.152: v1(5.43,28.46) 4.5,28.46 4.19,28.15 4.19,19.58 5.49,18.28 12.029,18.28 14.065,16.244 14.065,13.944 15.259,12.75 J8.4
D6: J5.6 J6.10 J7.5 U1.23 | length 26.8
  F.Cu w0.152: U1.23 4.32,27.36 v1(4.74,27.78) ; v1(5.73,15.31) J6.10 5.73,12.59 4.92,11.78 4.92,10.27 5.37,9.82 5.37,7.832 7,6.202 v1(7,4.975)
  GND w0.152: v1(4.74,27.78) 5.15,27.78 5.51,27.42 5.51,25.99 4.365,24.845 4.365,18.824 5.73,17.459 v1(5.73,15.31)
D9: J6.6 U1.19 | length 19.4
  F.Cu w0.152: U1.19 2.72,27.15 2.37,27.5 2.37,28.13 2.73,28.49 v1(3.25,28.49)
  B.Cu w0.152: v1(3.25,28.49) 3.885,27.855 3.885,19.454 4.289,19.049 8.27,15.069 v1(8.27,13.725)
D11: J5.4 J6.4 J7.3 U1.22 | length 27.1
  F.Cu w0.152: v1(3.82,15.17) 3.82,18.429 3.92,18.529 U1.22 ; J6.4@9.54,12.82 v1(10.18,12.18)
  GND w0.152: v1(3.82,15.17) 3.82,14.29 5.14,12.97 8.785,12.97 v1(9.54,13.725)
  B.Cu w0.152: v1(8.27,4.975) 8.27,6.56 10.18,8.47 v1(10.18,12.18)
D12: J6.8 U1.24 | length 13.5
  F.Cu w0.152: U1.24 4.72,25.22 v1(5.1,24.84) ; J6.8 v1(7,15.22)
  GND w0.152: v1(5.1,24.84) 5.1,23.53 4.67,23.1 4.67,18.95 7,16.62 v1(7,15.22)
D13: J8.3 U1.26 | length 22.5
  F.Cu w0.152: U1.26 5.52,25.22 v1(5.77,24.97)
  B.Cu w0.152: v1(5.77,24.97) 5.77,23.86 4.495,22.585 4.495,19.706 5.616,18.585 12.155,18.585 14.37,16.37 14.37,15.75 ; 14.37,15.78 14.37,15.75 ; J8.3 15.19,13.25 14.37,14.07 14.37,15.75
GND: C1.1 C2.1 C3.1 C4.1 C5.2 C6.2 C7.1 C8.1 C9.2 C10.1 C11.1 C12.1 C13.2 C14.1 C15.1 C16.1 C17.1 C18.1 D1.1 D2.1 D3.1 IC1.2 IC2.2 J1.2 J2.5 J2.6 J3.2 J3.MP1 J3.MP2 J5.2 J6.1 J6.13 J7.1 J8.2 J8.MP1 J8.MP2 J14.1 R2.1 R6.2 S1.1 U1.1 U1.2 U1.15 U1.33 U1.55 U3.2 U4.2 U5.9 U5.11 U5.18 U5.25 U7.2 | length 13.3
  F.Cu w0.152: U1.1@0.07,36.741 U1.2 0.23,35.68 0.68,35.23 ; C6.2@4.908,23.76 C6.2@4.92,23.773 ; 7.73,35.25 7.73,36.251 7.999,36.52 8.98,36.52 9.24,36.78 U1.55 ; U5.18 14.18,30.948 15.43,29.698 U5.25 ; U5.9 15.68,29.25 U5.25 ; U5.11 16.18,30.25 U5.25
  F.Cu w0.508: R6.2 11.847,23.82 C15.1@13.568,23.82
  other v1: 11.68,1.32 3.37,2.8 11.38,3.16 16.83,4.35 9.54,4.97 12.26,5.06 3.47,5.5 1.89,6.38 12.38,6.4 9.95,6.55 14.54,7.03 12.4,7.37 20.03,7.38 1.87,7.39 -5.15,7.51 12.39,8.94 7.37,9.41 6.08,9.72 -0.38,11.6 -5.63,11.71 1.95,14.67 20.06,15 -5.15,15.42 9.89,15.51 13.09,15.92 12.08,17.05 11.09,19.91 5.4,20.44 12.32,20.93 16.82,20.96 -2.11,21.04 -0.91,21.13 19.94,21.21 -5.97,21.28 -0.93,21.97 -0.91,22.81 -5.83,24.93 19.98,25.07 14.62,26 -4.47,26.46 0.91,26.77 19.67,27.26 4.73,29.06 -3.76,30.04 6.06,30.46 19.66,30.62 3.77,31.4 7.43,31.65 17.35,32.23 18.96,32.7 10.668,33.274 1.09,33.66 18.98,34.29 2.98,34.33 7.02,34.32 4.98,34.35 -1.38,34.98 -6.14,35.12 -5.03,35.11 -2.84,35.13
GP0: J18.1 U1.4 | length 33
  F.Cu w0.152: U1.4 v1(0.07,33.89)
  GND w0.152: J18.1 -3.67,5.16 -3.67,21.319 -1.495,23.494 -1.495,33.615 -0.93,34.18 -0.22,34.18 v1(0.07,33.89)
GP2: J19.1 U1.11 | length 27.8
  F.Cu w0.152: U1.11@1.1,30.48 U1.11 1.63,30.48 v1(1.83,30.28)
  GND w0.152: J19.1 -3.365,6.355 -3.365,21.193 -1.19,23.368 -1.19,25.841 1.83,28.861 v1(1.83,30.28)
LED1: R3.2 U1.14 | length 10.3
  F.Cu w0.152: R3.2 -1.43,20.953 -1.43,24.51 -0.96,24.98 -0.96,26.38 0.07,27.41 U1.14
LED2: R4.2 U1.16 | length 8
  F.Cu w0.152: R4.2 0.34,19.148 v1(0.34,21.85) ; v1(0.72,25.01) U1.16
  GND w0.152: v1(0.34,21.85) 0.72,22.23 v1(0.72,25.01)
M1_IN1: IC1.1 U1.6 | length 7.9
  F.Cu w0.152: IC1.1 -5.79,29.171 -2.976,31.985 -0.95,31.985 -0.455,32.48 U1.6
M1_IN2: IC1.3 U1.8 | length 9.4
  F.Cu w0.152: IC1.3 -5.52,26.59 -4.96,27.15 -4.96,29.57 -2.85,31.68 U1.8
M1_O1: IC1.6 J3.6 | length 9
  F.Cu w0.152: v1(-4.34,28.49) IC1.6
  GND w0.152: v1(-4.34,28.49) -4.605,28.755 -4.71,28.86 -4.71,33.2 v1(-4.24,33.67)
  B.Cu w0.152: v1(-4.24,33.67) -3.66,34.25 J3.6
M1_O2: IC1.4 J3.1 | length 10.9
  F.Cu w0.152: v1(-4.32,27.46) -3.45,26.59 IC1.4
  B.Cu w0.152: v1(-4.32,27.46) -5.49,27.46 -6.05,28.02 -6.05,31.3 -5.6,31.75 J3.1
M2_IN1: IC2.1 U1.44 | length 27.3
  F.Cu w0.152: U1.44 v1(10.57,31.68) ; v1(18.51,12.66) 18.51,10.65 19.11,10.05 IC2.1
  GND w0.152: v1(10.57,31.68) 11.479,31.68 13.11,30.049 13.11,19.3 18.01,14.4 18.01,13.16 v1(18.51,12.66)
M2_IN2: IC2.3 U1.46 | length 25.7
  F.Cu w0.152: U1.46 v1(10.65,32.48) ; v1(18.68,13.44) 19.51,12.61 IC2.3
  GND w0.152: v1(10.65,32.48) 11.11,32.48 13.415,30.175 13.415,19.426 18.68,14.161 v1(18.68,13.44)
M2_O1: IC2.6 J8.6 | length 5.6
  F.Cu w0.152: IC2.6 17.637,10.05 18.13,10.543 18.13,12.19 v1(17.82,12.5)
  B.Cu w0.152: J8.6 16.67,11.75 17.42,12.5 v1(17.82,12.5)
M2_O2: IC2.4 J8.1 | length 3.7
  F.Cu w0.152: IC2.4 16.91,12.7 v1(17.47,13.26)
  B.Cu w0.152: J8.1 17.09,14.25 17.47,13.87 v1(17.47,13.26)
MISO: J5.1 J6.3 J7.2 U1.39 | length 30.9
  F.Cu w0.152: v1(8.9,12.26) 8.9,15.98 9.54,16.62 J6.3 v1(9.54,19.75) ; U1.39 9.99,29.28 v1(10.58,28.69)
  GND w0.152: v1(8.9,12.26) 8.9,9.14 10.56,7.48 10.56,3.85 9.54,2.83 v1(9.54,1.325) ; v1(9.54,19.75) 10.87,21.08 10.87,28.4 v1(10.58,28.69)
MOSI: J5.3 J6.5 J7.4 U1.37 | length 29.6
  F.Cu w0.152: v1(8.12,11.96) 7.63,12.45 7.63,16.01 8.27,16.65 J6.5 v1(8.27,19.74) ; U1.37 9.78,28.48 v1(10.3,27.96)
  GND w0.152: v1(8.12,11.96) 8.12,9.13 8.85,8.4 8.85,3.7 8.27,3.12 v1(8.27,1.325) ; v1(8.27,19.74) 10.3,21.77 v1(10.3,27.96)
MOTOR1_A: J3.4 U1.10 | length 4
  F.Cu w0.152: v1(-0.8,31.17) -0.51,30.88 U1.10
  B.Cu w0.152: J3.4 -1.364,33.25 -0.8,32.686 v1(-0.8,31.17)
MOTOR1_B: J3.3 U1.12 | length 4.5
  F.Cu w0.152: v1(-0.84,30.48) -0.44,30.08 U1.12
  B.Cu w0.152: J3.3 -1.295,32.75 -1.105,32.56 -1.105,31.575 -1.3,31.38 -1.3,30.94 v1(-0.84,30.48)
Net-(C4-Pad2): C4.2 U5.10 | length 1.6
  F.Cu w0.152: U5.10 18.972,29.75 C4.2
Net-(C5-Pad1): C5.1 U1.17 XTAL1.1 | length 3.7
  F.Cu w0.152: C5.1 XTAL1.1 0.749,23.82 1.52,24.591 U1.17
Net-(C6-Pad1): C6.1 U1.18 XTAL1.2 | length 3.3
  F.Cu w0.152: U1.18 2.32,25.21 2.01,24.9 XTAL1.2 C6.1
Net-(C7-Pad2): C7.2 U5.20 | length 1.6
  F.Cu w0.152: C7.2 11.903,30.25 U5.20
Net-(C11-Pad2): C9.1 C11.2 C18.2 J20.1 R5.1 SW1.3 U4.1 U4.3 U7.1 U7.3 | length 43
  F.Cu w0.152: v2(-2.6,15.02) -2.6,15.076 -0.986,16.69 R5.1 ; U4.1 0.91,6.18 1.39,5.7 2.29,5.7 2.81,6.22 U4.3 ; U7.1 11.43,7.61 11.88,8.06 12.88,8.06 13.33,7.61 U7.3
  F.Cu w0.254: J20.1@-1.18,5.87 -0.63,6.42 C11.2
  F.Cu w0.381: C9.1 -2.44,11.8 -2.44,8.57 -1.468,7.598 C11.2 0.088,6.88 U4.1 ; v2(5.98,11.87) C18.2@9.91,7.94 ; C18.2 10.627,6.87 U7.1
  F.Cu w0.508: v2(-2.6,15.02) -2.6,13.4 -2.12,12.92 C9.1
  PWR w0.381: v2(-2.6,15.02) -1.61,15.02 1.53,11.88 2.4,11.88 v2@6.01,11.88
  B.Cu w0.635: SW1.3 -3.39,14.23 v2(-2.6,15.02)
Net-(D1-Pad2): D1.2 R3.1 | length 1.6
  F.Cu w0.152: D1.2 R3.1
Net-(D2-Pad2): D2.2 R4.1 | length 1.6
  F.Cu w0.152: D2.2 R4.1
Net-(D3-Pad2): D3.2 R5.2 | length 1.6
  F.Cu w0.152: D3.2 R5.2
Net-(D4-Pad1): D4.1 R7.1 | length 1.7
  F.Cu w0.152: D4.1@19.28,17.855 D4.1
  F.Cu w0.254: R7.1 D4.1@19.28,17.855
Net-(L1-Pad2): L1.2 U1.31 | length 2.7
  F.Cu w0.254: U1.31 7.92,25.21 L1.2@9.345,23.785
Net-(R6-Pad1): R6.1 U3.5 | length 1.8
  F.Cu w0.254: R6.1 11.937,21.89 U3.5
Net-(R7-Pad2): R7.2 U3.1 | length 5.2
  F.Cu w0.152: U3.1 13.63,19.81 14.19,20.37 15.82,20.37 16.51,19.68 R7.2
Net-(R8-Pad2): R8.2 U1.35 | length 4.5
  F.Cu w0.152: U1.35 9.76,27.68 10.2,27.24 11.01,27.24 11.54,27.77 v1(11.54,28.64)
  B.Cu w0.152: v1(11.54,28.64) R8.2@12.308,29.408
Net-(R9-Pad2): R9.2 U1.34 | length 13
  F.Cu w0.152: v1(7.66,28.38) 7.66,26.85 8.07,26.44 8.84,26.44 9.28,26.88 U1.34
  B.Cu w0.152: v1(7.66,28.38) 8.03,28.75 8.68,28.75 10.106,27.324 11.514,27.324 13.21,29.02 13.21,30.18 12.363,31.027 R9.2
R\E\S\E\T\: J17.1 S1.2 U1.40 | length 45.1
  F.Cu w0.152: v1(-3.24,33.63) -3.23,33.62 S1.2 -1.2,33.62 -0.369,34.451 1.199,34.451 1.91,33.74 1.91,31.811 4.041,29.68 U1.40
  GND w0.152: J17.1 -4.47,5.87 -3.975,6.365 -3.975,21.445 -1.8,23.62 -1.8,30.28 -3.76,32.24 -3.76,33.11 v1(-3.24,33.63)
SCK: J5.5 J6.7 J7.6 U1.36 | length 29.3
  F.Cu w0.152: v1(6.37,15.68) 6.37,16 7,16.63 J6.7 7,19.72 v1(7.76,20.48) ; v1(8.47,27.03) U1.36
  GND w0.152: v1(7.76,20.48) 7.76,26.32 v1(8.47,27.03)
  B.Cu w0.152: v1(6.37,15.68) 6.37,12.77 8.68,10.46 8.68,7.56 7.64,6.52 7.64,3.69 7,3.05 v1(7,1.325)
SCL: J5.9 J6.11 J7.10 R10.1 U1.27 U5.23 | length 39.9
  F.Cu w0.152: v1(4.46,17.275) 4.46,20.77 v1(5.27,21.58) ; U1.27 5.92,27.67 v1(6.59,28.34) ; v1(11,29.5) 11.254,29.246 11.934,29.246 12.43,28.75 U5.23
  GND w0.152: v1(5.27,21.58) 6.269,22.579 6.269,28.019 v1(6.59,28.34)
  B.Cu w0.152: v1(4.46,1.325) 4.46,3.02 5.09,3.65 5.09,5.59 5.09,6.18 3.37,7.9 3.37,10.75 5.08,12.46 5.08,16.655 v1(4.46,17.275) ; v1(6.59,28.34) 8.478,30.227 R10.1 10.272,30.227 v1(11,29.5)
SDA: J5.7 J6.9 J7.8 R11.1 U1.29 U5.24 | length 36.9
  F.Cu w0.152: v1(4.79,9.47) 4.48,9.78 4.48,11.929 5.09,12.539 5.09,16.01 5.73,16.65 J6.9 5.73,19.44 v1(6.6,20.31) ; U1.29 6.72,27.33 v1(7.03,27.64) ; v1(12.51,27.35) U5.24@13.41,28.25
  GND w0.152: v1(6.6,20.31) 7.03,20.74 v1(7.03,27.64)
  B.Cu w0.152: v1(4.79,9.47) 5.34,8.92 5.34,7.37 6.36,6.35 6.36,3.72 5.73,3.09 v1(5.73,1.325) ; v1(7.03,27.64) 9.139,27.64 10.159,26.62 R11.1 11.78,26.62 v1(12.51,27.35)
SWDCLK: J4.1 U1.53 | length 2.9
  F.Cu w0.152: U1.53 10.021,35.68 10.771,34.93 J4.1
SWDIO: J4.2 U1.51 | length 4.6
  F.Cu w0.152: U1.51 10.39,34.88 11.17,34.1 12.541,34.1 13.23,34.789 J4.2
SWO: J15.1 U1.47 | length 34.3
  F.Cu w0.152: v1(7.59,32.88) U1.47
  GND w0.152: J15.1 0.32,5.82 -1.41,7.55 -1.41,14.54 1.453,17.403 1.453,27.613 6.72,32.88 v1(7.59,32.88)
USB+: J2.3 R8.1 | length 3.2
  B.Cu w0.152: R8.1 14.94,30.297 14.94,31.05 15.17,31.28 J2.3
USB-: J2.2 R9.1 | length 2.4
  B.Cu w0.152: R9.1 15.035,31.93 J2.2
VBUS: C13.1 C15.2 D4.2 J2.1 U1.32 U3.4 | length 30.4
  F.Cu w0.254: U1.32 8.72,25.37 9,25.09 v1(9.74,25.09) ; U3.4 17.115,21.89 D4.2
  F.Cu w0.635: v2(15.29,25.09) 15.29,23.822 C15.2@15.292,23.82 ; C15.2 15.53,23.793 U3.4
  PWR w0.254: v1(9.74,25.09) v2(15.29,25.09)
  PWR w0.635: v2(15.1,34.52) 15.83,34.52 16.57,33.78 16.57,26.37 v2(15.29,25.09)
  B.Cu w0.508: C13.1@14.35,32.58 J2.1
  B.Cu w0.635: C13.1@14.35,32.58 C13.1 14.07,33.49 v2(15.1,34.52)
VCC: C8.2 C12.2 C17.2 IC1.5 IC2.5 J3.5 J8.5 U7.5 | length 54
  F.Cu w0.152: C12.2 -1.532,27.537 v1(-0.64,28.43)
  F.Cu w0.381: IC1.5@-3.18,27.54 -1.793,27.54 C12.2@-1.79,27.537 ; v1(-2.6,24.93) -1.69,25.84 C12.2 ; v2(12.81,11.24) 15.008,11.24 C8.2 16.907,10.997 IC2.5
  F.Cu w0.508: U7.5 11.43,11.237 C17.2 v2(12.81,11.24)
  PWR w0.381: v1(-2.6,24.93) -2.6,21.48 -2.75,21.33 -3.621,20.459 -3.621,13.869 -3.621,13.231 -0.86,10.47 8.38,10.47 12.04,10.47 v2(12.81,11.24)
  B.Cu w0.152: J3.5 -1,33.75 0.11,32.64 0.11,29.18 v1(-0.64,28.43)
  B.Cu w0.254: v2(12.81,11.24) 13.74,11.24 14.75,12.25 J8.5
VPP: C16.2 J1.1 J6.2 R1.2 SW1.2 U3.3 | length 32.4
  F.Cu w0.508: R1.2 1.268,19.532 v2(2.17,18.63) ; J6.2@10.955,13.87 J1.1
  F.Cu w0.635: J1.1 15.533,16.173 C16.2 ; C16.2@15.53,17.313 U3.3
  PWR w0.635: v2(2.17,18.63) 8.47,18.63 10.12,16.98 J1.1
  B.Cu w0.635: SW1.2 -1.88,12.38 2.17,16.43 v2(2.17,18.63)
pads on no net: H1.Un1 H2.Un1 H3.Un1 J2.4 J10.1 J12.1 J13.1 J16.1 SW1.1 SW1.Un1 SW1.Un2 SW1.Un3 SW1.Un4 SW1.Un5 SW1.Un6 U1.3 U1.5 U1.7 U1.38 U1.41 U1.42 U1.43 U1.45 U1.48 U1.49 U1.50 U1.52 U1.54 U1.56 U1.57 U1.58 U1.59 U1.60 U1.61 U4.4 U5.1 U5.2 U5.3 U5.4 U5.5 U5.6 U5.7 U5.12 U5.14 U5.15 U5.16 U5.17 U5.19 U5.21 U5.22 U7.4

## Polygon pours and split planes (outlines as drawn)
GND on F.Cu "F.Cu-GND" (solid, remove dead copper, pour order 0): 21,7 14,0 0,0 -7,7 -7,35.5 21,35.5
GND on GND "GND-GND" (solid, remove dead copper, pour order 1): 21,7 14,0 0,0 -7,7 -7,35.5 21,35.5
GND on B.Cu "B.Cu-GND" (solid, remove dead copper, pour order 2): 21,7 14,0 0,0 -7,7 -7,35.5 21,35.5
GND on PWR "PWR-GND" (solid, remove dead copper, pour order 3): 21,7 14,0 0,0 -7,7 -7,35.5 21,35.5

## Keep-outs
Edge.Cuts:
  lines w0.05: -7,7 -7,37 ; -7,7 0,0 ; -7,7 -7,37 ; -7,7 0,0 ; -7,37 -3,41 ; -7,37 -3,41 ; -3,41 17,41 ; -3,41 17,41 ; 0,0 14,0 ; 0,0 14,0 ; 14,0 21,7 ; 14,0 21,7 ; 17,41 21,37 ; 17,41 21,37 ; 21,7 21,37 ; 21,7 21,37

## Silkscreen, mask and mechanical layers (free items; w line width, h text height)
F.SilkS:
  lines w0.102: 10.71,37.85 12,35.94 ; 10.71,37.86 14.17,37.86 ; 12.77,36.63 15.35,36.63 ; 12.78,36.62 13.28,35.84
  lines w0.5: 16.5,38 16.5,36.75 17.75,36.75 ; 16.5,39.25 17.75,39.25 17.75,38 19,38 19,36.75
  text "SWDCLK" at 11.405,38.214 h0.64
  text "SWDIO" at 13.274,36.934 h0.64
  text "+" at 12.493,15.153 h0.8
  text "ON" at -5.656,14.251 h1.2
  text "OFF" at -6,8.111 h1.2
  text "AstroAnt" at 13.295,3.834 h1.27 r45
  text "@MIT Media Lab / SEI" at 13.709,1.021 h0.76 r45

## Text inside footprints (layer, text, board x,y; h text height)
J2: Dwgs.User "PCB edge" at 20.639,30.277 h0.5 r90